# Altium PCB doan2.PcbDoc
Units mil, origin at the board's own origin, x right, y up, seen from the top; angles counter-clockwise.
Board outline 2190 x 3135 mil, 2 copper layers (Top Layer, Bottom Layer); 62 components, 43 nets, 240 pads, 31 vias.
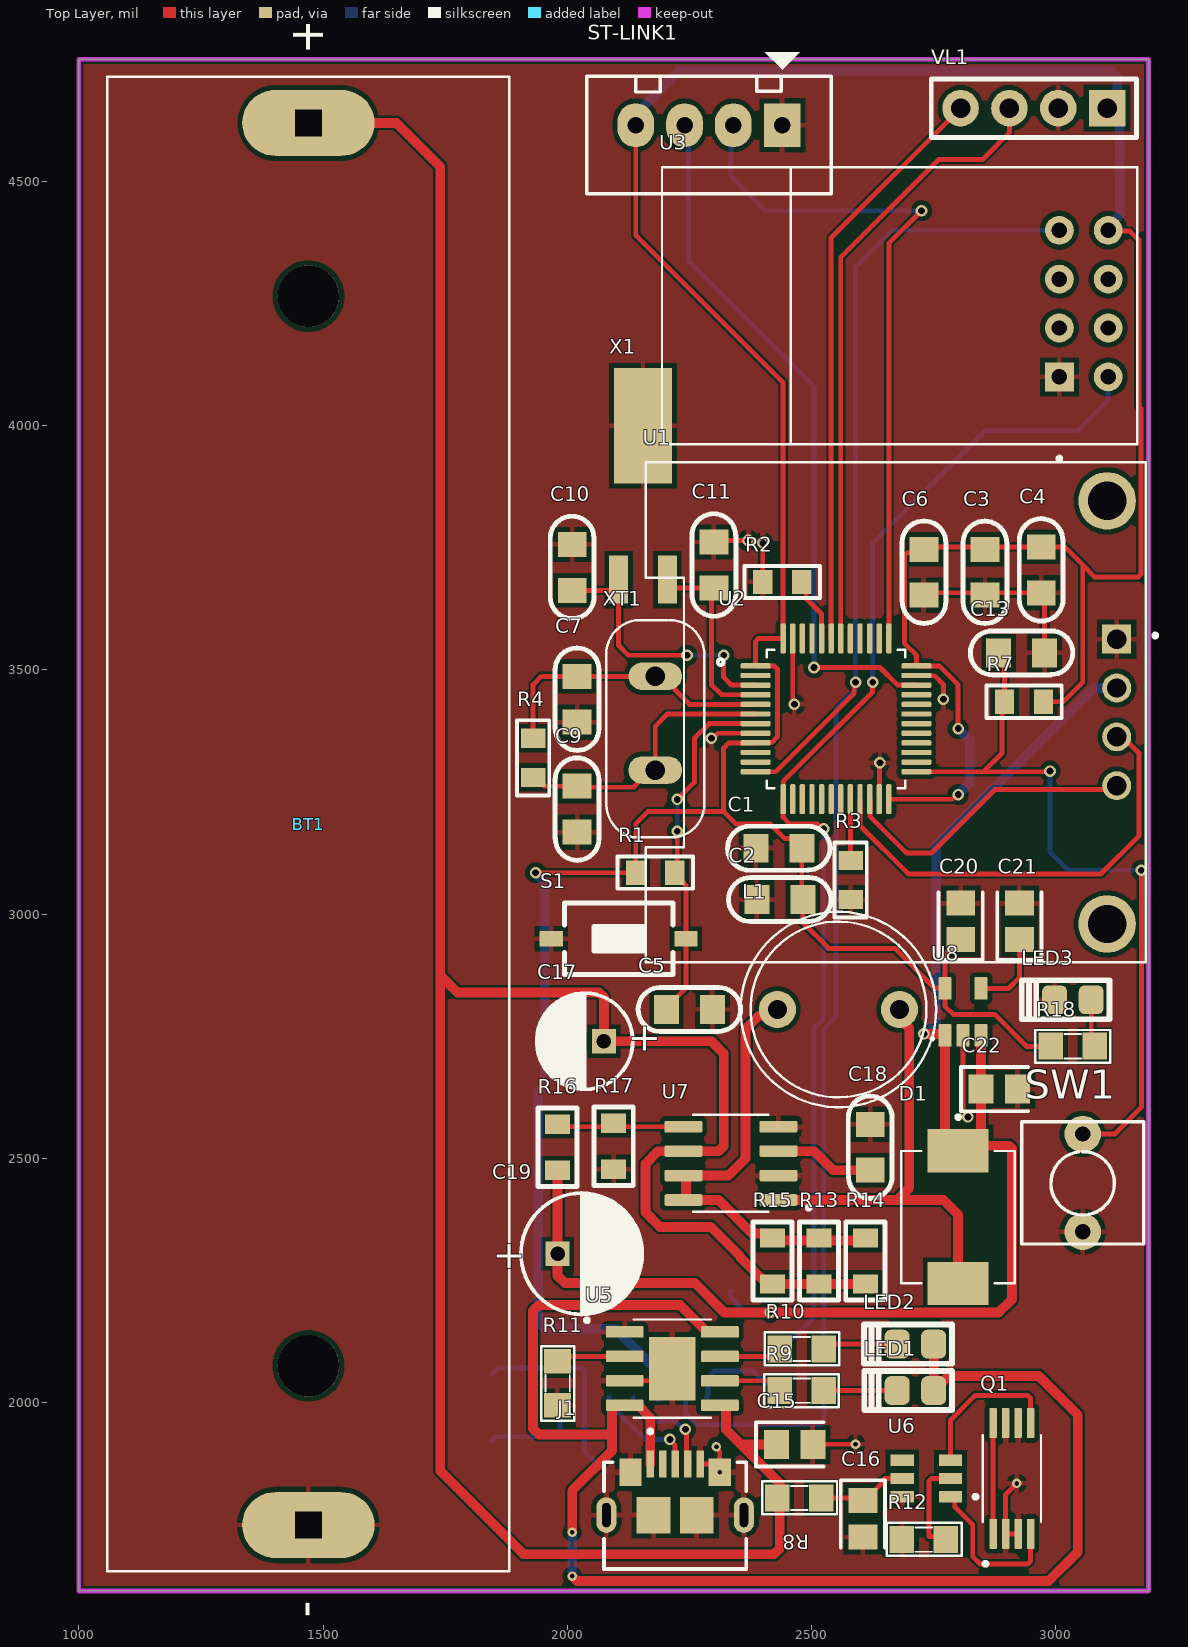
[diagram p0: Top Layer view]
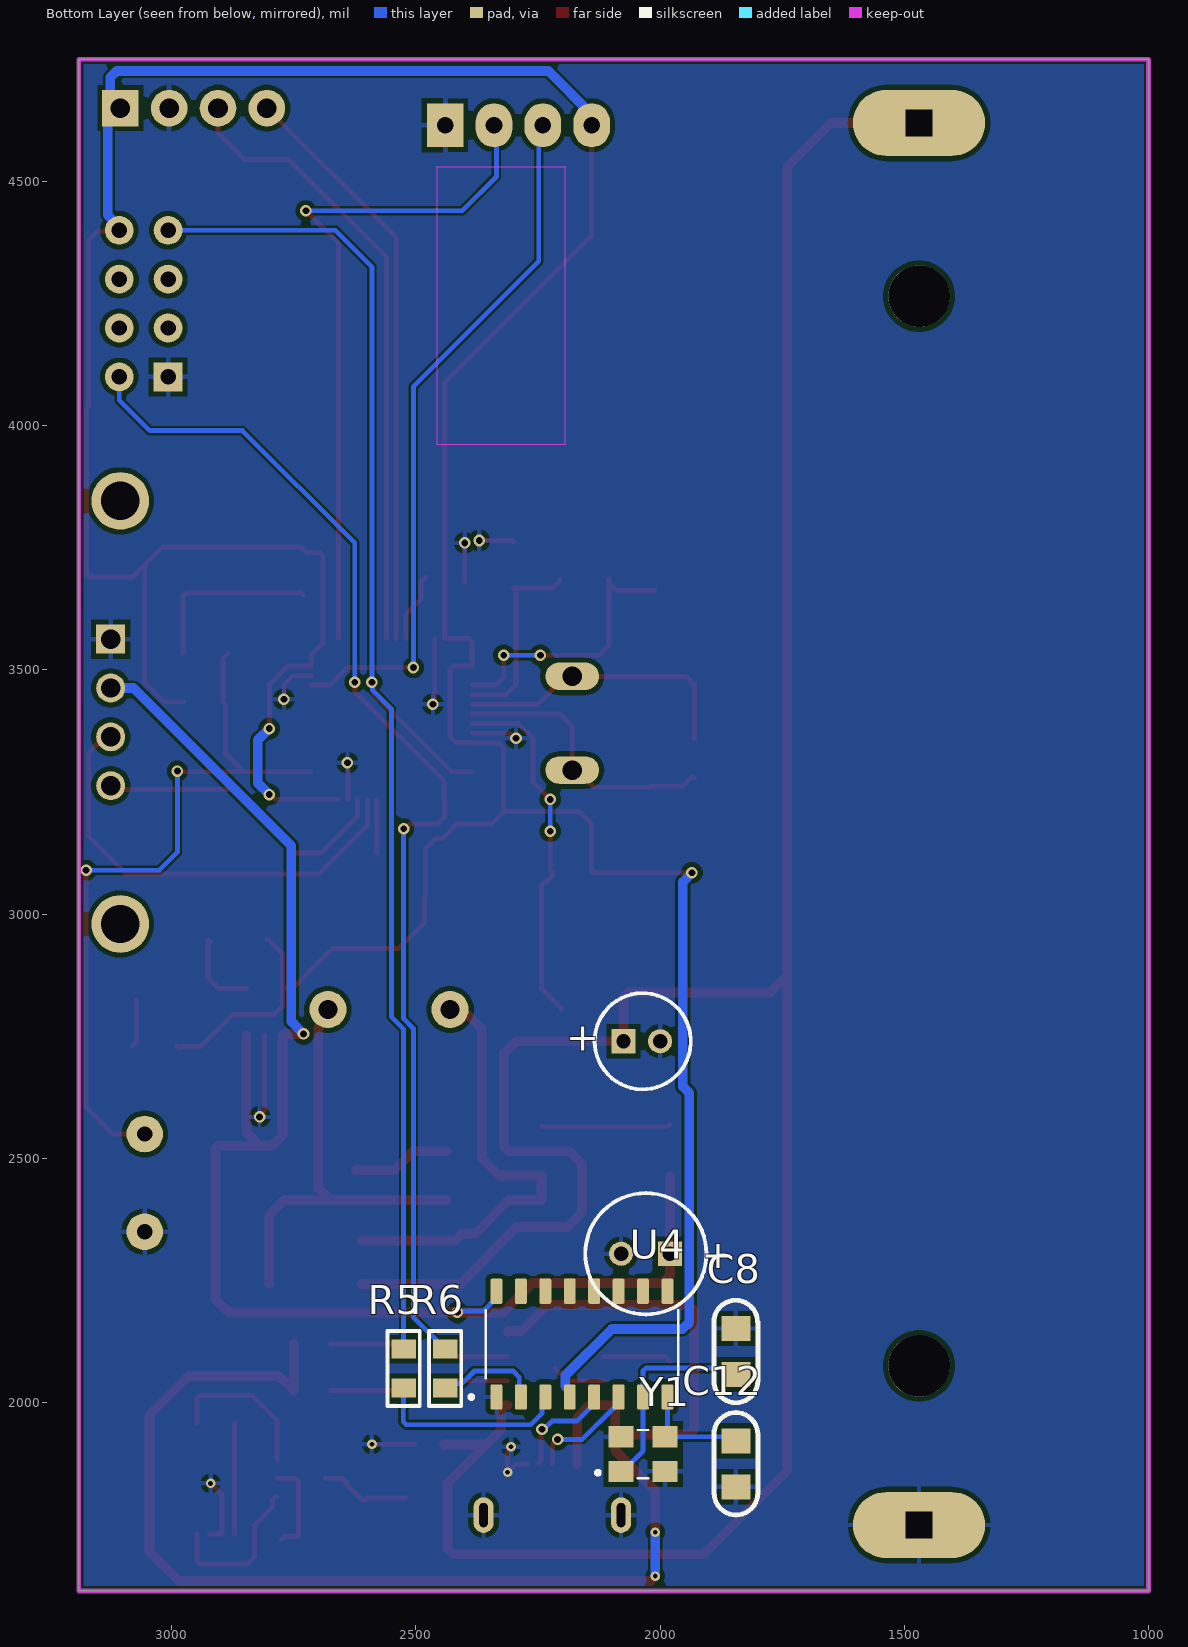
[diagram p1: Bottom Layer view, seen from below]
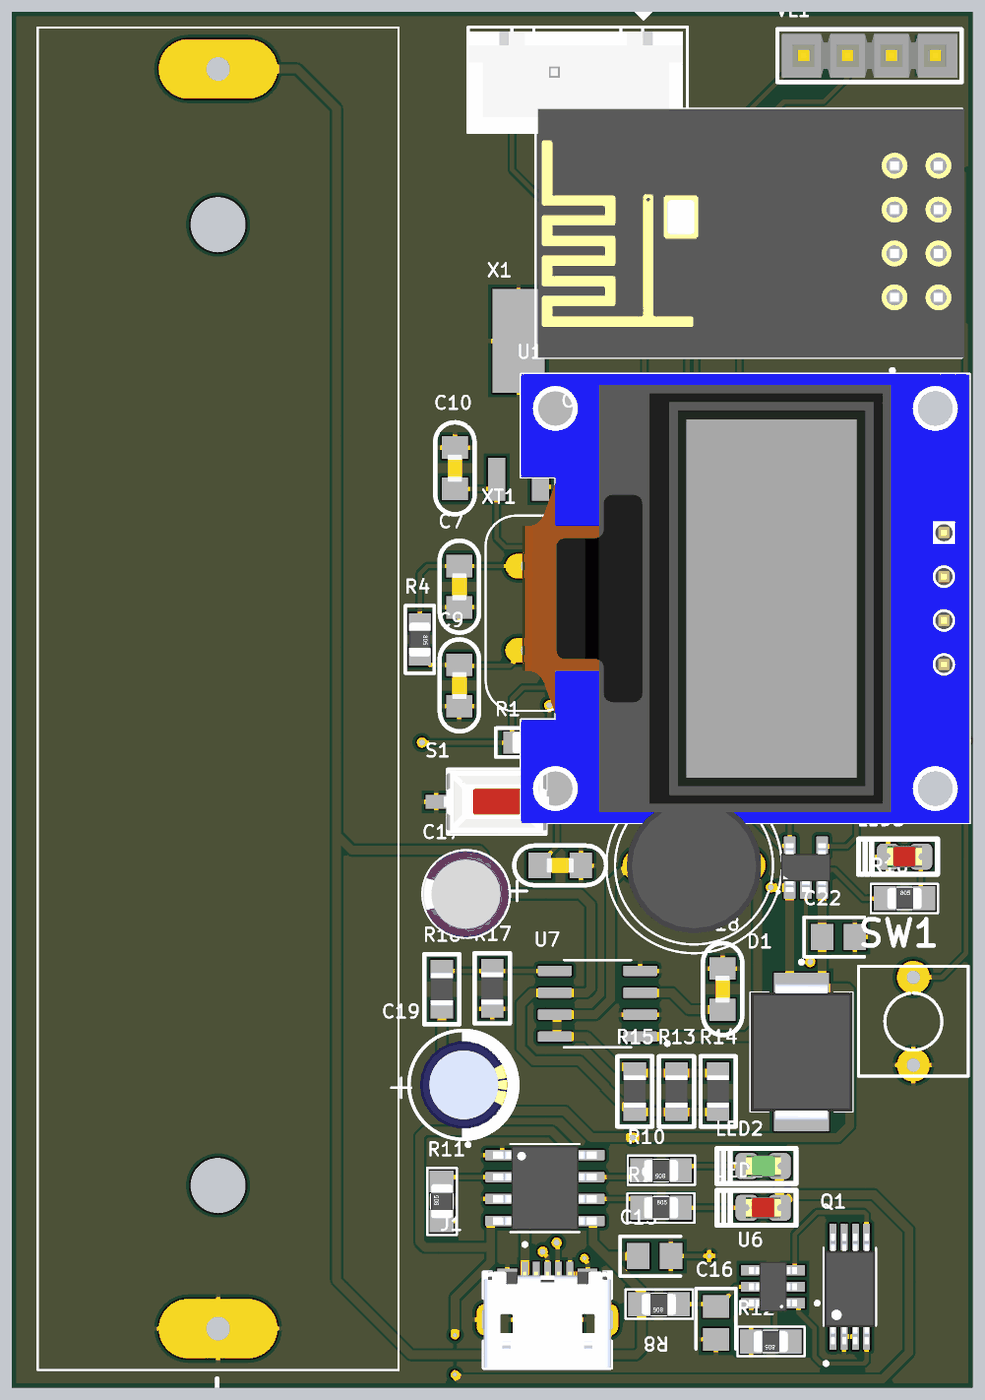
[diagram p2: 3D render of the assembled board from above, using the file's embedded part models]
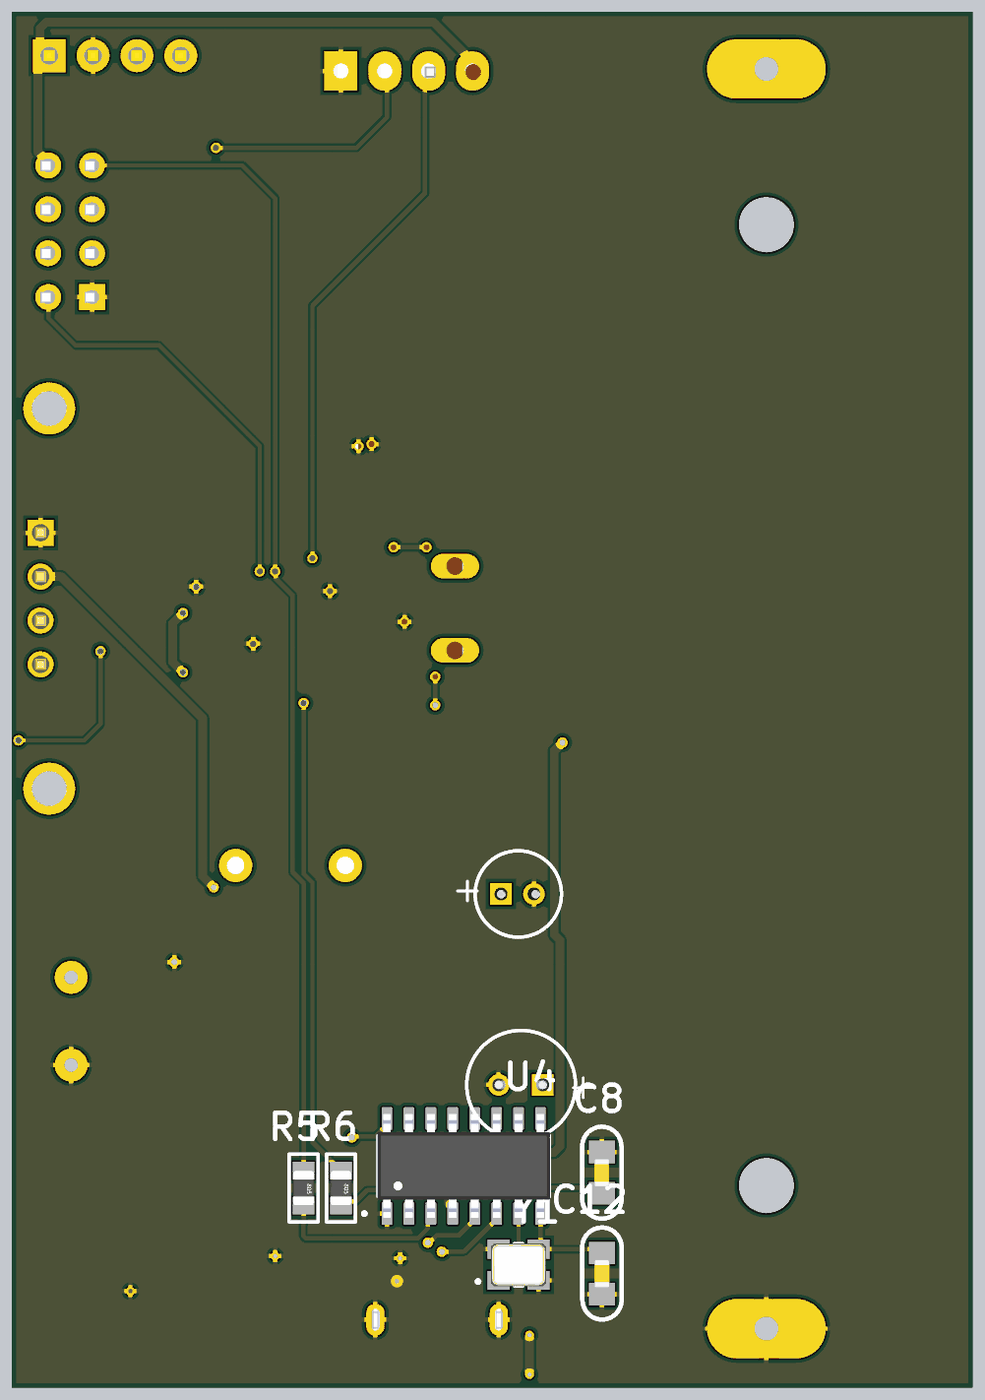
[diagram p3: 3D render of the assembled board from below, using the file's embedded part models]

## Layer stack, top to bottom
Top Solder: solder mask 0.4, Solder Resist, Dk 3.5
Top Layer: signal copper 1.4
Dielectric 1: dielectric 12.6, FR-4, Dk 4.8
Bottom Layer: signal copper 1.4
Bottom Solder: solder mask 0.4, Solder Resist, Dk 3.5

## Board outline
1000,1615 1000,4750 3190,4750 3190,1615

## Design rules (kind name [scope] priority, off if disabled: settings)
Clearance [All] p1: gap=10 ignorepadtopadclearanceinfootprint=TRUE except(5: Arc-Arc Arc-Track Arc-SMDPad Arc-THPad Arc-Via Arc-Fill Arc-Poly Arc-Region Arc-Text Arc-Hole Track-Track Track-SMDPad Track-THPad Track-Via Track-Fill Track-Poly Track-Region Track-Text Track-Hole)
HoleSize [All] p1: absolutevalues=TRUE maxlimit=200 minlimit=1 maxpercent=80.000 minpercent=20.000
PolygonConnect [All] p1: connectstyle=Relief reliefconductorwidth=10 reliefentries=4 polygonreliefangle="90 Angle" airgapwidth=10
RoutingVias [All] p1: holewidth=10 width=20 viastyle="Through Hole" minholewidth=10 minwidth=20 maxholewidth=10 maxwidth=20
SolderMaskExpansion [All] p1: expansion=4 istentingtop=FALSE
Width [All] p1: maxlimit=20 minlimit=10 preferedwidth=10 minimp=50.000000 maximp=50.000000 favimp=50.000000
29 further rules are at their usual default settings.

## Classes and differential pairs
component class Power_supply: BT1 C15 C16 C17 C18 C19 C20 C21 C22 D1 J1 L1 LED1 LED2 LED3 Q1 R8 R9 R10 R11 R12 R13 R14 R15 R16 R17 R18 U5 U6 U7 U8
component class doan2: C1 C2 C3 C4 C5 C6 C7 C8 C9 C10 C11 C12 C13 R1 R2 R3 R4 R5 R6 R7 S1 ST-LINK1 SW1 U1 U2 U3 U4 VL1 X1 XT1 Y1

## Components (designator, comment, footprint, x,y, rotation, side; value= is the part's Value field where it differs from the comment)
BT1 "BH-18650-PC" BAT_BH-18650-PC 1470,3184.68 r90 top
C1 "Cap Non-pol" C-NP-0805 2433,3135 r0 top value=104
C2 "Cap Non-pol" C-NP-0805 2435,3030 r0 top value=104
C3 "Cap Non-pol" C-NP-0805 2855,3700 r90 top value=104
C4 "Cap Non-pol" C-NP-0805 2970,3705 r90 top value=104
C5 "Cap Non-pol" C-NP-0805 2250,2805 r0 top value=104
C6 "Cap Non-pol" C-NP-0805 2730,3700 r270 top value=104
C7 "Cap Non-pol" C-NP-0805 2020,3440 r270 top value=30pF
C8 "Cap Non-pol" C-NP-0805 1845,2105 r90 bottom value=22pF
C9 "Cap Non-pol" C-NP-0805 2020,3215 r270 top value=30pF
C10 "Cap Non-pol" C-NP-0805 2010,3710 r90 top value=10pF
C11 "Cap Non-pol" C-NP-0805 2300,3715 r90 top value=10pF
C12 "Cap Non-pol" C-NP-0805 1845,1875 r270 bottom value=22pF
C13 "Cap Non-pol" C-NP-0805 2930,3535 r0 top value=104
C15 "10uF" C2012-0805 2465,1915 r0 top
C16 "10uF" C2012-0805 2605.28,1762.81 r270 top
C17 "Cap Pol" "RADIAL B" 2075,2740 r180 top value=220uF
C18 "Cap Non-pol" C-NP-0805 2620,2523 r270 top value=0.1uF
C19 "Cap Pol" "RADIAL C" 1980,2305 r0 top value=470uF
C20 "1uF" C2012-0805 2805,2985 r90 top
C21 "22nF" C2012-0805 2925,2985 r90 top
C22 "1uF" C2012-0805 2884.2,2642.24 r0 top
D1 "SS34" DIOM7959X265N 2800,2380 r270 top
J1 "USB3076-XX-X_REVC5" GCT_USB3076-XX-X_REVC5 2220.75,1770 r0 top
L1 "100uH" IMPE8-RS2 2680,2805 r180 top
LED1 "LED-0805RVC" "Led 0805R" 2712.6,2025 r180 top value=Red
LED2 "LED-0805GVC" "Led 0805G" 2712.4,2120 r180 top value=Green
LED3 "LED-0805RVC" "Led 0805R" 3035,2825 r180 top value=Red
Q1 "FS8205A" SOP65P640X120-8N 2910,1845 r90 top
R1 "RES_SMD_0805" "DIEN TRO 0805" 2180,3085 r180 top value=100R
R2 "RES_SMD_0805" "DIEN TRO 0805" 2440,3680 r180 top value=100R
R3 "RES_SMD_0805" "DIEN TRO 0805" 2580,3070 r90 top value=100R
R4 "RES_SMD_0805" "DIEN TRO 0805" 1930,3320 r90 top value=1k
R5 "RES_SMD_0805" "DIEN TRO 0805" 2525,2070 r90 bottom value=100R
R6 "RES_SMD_0805" "DIEN TRO 0805" 2440,2070 r90 bottom value=100R
R7 "RES_SMD_0805" "DIEN TRO 0805" 2935,3435 r0 top value=1k
R8 "RESISTOR SMD" RES-SM-0805 2520,1805 r180 top value=1K
R9 "RESISTOR SMD" RES-SM-0805 2435,2025 r0 top value=1K
R10 "RESISTOR SMD" RES-SM-0805 2525,2110 r180 top value=1K
R11 "RESISTOR SMD" RES-SM-0805 1980,1995 r90 top value=1K
R12 "RESISTOR SMD" RES-SM-0805 2775,1720 r180 top value=1K
R13 "RESISTOR" R-0805 2515,2290 r90 top value=1K
R14 "RESISTOR" R-0805 2610,2290 r90 top value=1K
R15 "RESISTOR" R-0805 2420,2290 r90 top value=1K
R16 "RESISTOR" R-0805 1980,2523 r270 top value=1.2k
R17 "RESISTOR" R-0805 2095,2525 r90 top value=390R
R18 "RESISTOR SMD" RES-SM-0805 2990,2730 r0 top value=220R
S1 "SW-SMD" SW-SMD 2105,2950 r0 top
ST-LINK1 "JP4" CON4 2440,4615 r180 top value="Connector 4"
SW1 "SW" SW2 3055,2350 r90 top value="SW chip 2 pin"
U1 "DM-OLED096-636" MODULE_DM-OLED096-636 2671.93,3413.07 r270 top
U2 "STM32F103C8T6" QFP50P900X900X160-48N 2550,3400 r0 top
U3 "ESP8266-01/ESP-01" XCVR_ESP8266-01/ESP-01 2680,4250 r90 top
U4 "CH340G" SOIC127P600X180-16N 2160,2120 r90 bottom
U5 "TP4056" SOP127P600X175-9N 2215,2070 r0 top
U6 "DW01A" SOT95P280X145-6N 2735,1845 r180 top
U7 "MC34063ADG4" SOIC127P599X175-8N 2335,2490 r180 top
U8 "RT9193-33GB" SOT94P279X129-5N 2810,2800 r90 top
VL1 "Header 4" "Header 4" 3105,4650 r180 top
X1 "Crystal1" "Crystal cylinder" 2205,3685 r270 top value=32.768Khz
XT1 "Crystal2" Crystal.HC49/USxx 2180,3295 r180 top value=4MHz
Y1 "8Mhz" XTAL_ECS-250-6-33B2-CTN-TR3 2035,1895 r180 bottom

## Footprints (in the part's own frame and the unit in brackets; to place one, negate y for a bottom-side part, rotate by r counter-clockwise, add the part's x,y. Pads: shape width x height; smd on the part's side, far side on the other; paste and mask are expansions set on the pad)
BAT_BH-18650-PC [mm]
  oval 3.44x6.88 hole 1.38 square: N(-36.45,0) P(36.45,0)
  round 3.2 hole 3.2 unplated: ""(-28.17,0) ""(27.44,0)
  silkscreen extent -38.85,-10.45 38.85,10.45
C2012-0805 [mm] "Capacitor Chip 0805 package"
  rect 1.3x1.5 smd: 1(-0.945,-0.007) 2(0.955,-0.007)
  silkscreen extent -1.99,-1.16 1.51,1.14, body extent -0.89,-0.58 0.89,0.58, height 0.79
C-NP-0805 [mm] "Chip Capacitor; Non-polarized; Body 2.0 x 1.3 mm (LxW typ) [2012]"
  rect 1.3x1.5 smd: 1(-1.194,0) 2(1.194,0)
  silkscreen extent -2.67,-1.14 2.66,1.14, body extent -0.8,-0.43 0.8,0.43, height 0.79
CON4 [mil] "CON4"
  rect 75x90 hole 34: 1(0,0)
  oval 75x90 hole 34: 2(100,0) 3(200,0) 4(300,0)
  silkscreen extent -100,-150 400,140, body extent -90,-90 398,136, height 276
"Crystal cylinder" [mm] "Crystal footsprint type 1"
  rect 2.5x1 smd: 1(0,0) 2(0,-2.54)
  rect 6x3 smd: 3(-8,-1.27)
  body extent -10.02,-2.6 0.53,0.07, height 2.29
Crystal.HC49/USxx [mil] "HC49USxx package"
  rrect100% 110x56 hole 40: 1(0,0) 2(0,-192)
  silkscreen extent -100,-307 100,138, body extent -90,-298 90,128, height 200
"DIEN TRO 0805" [mil] "Chip Resistor; Body 2.0 x 1.3 mm (LxW typ)"
  rect 39.37x50 smd: 1(-40,0) 2(40,0)
  silkscreen extent -77,-33 77,33, body extent -39,-25 39,25, height 31
DIOM7959X265N [mm]
  rect 2.25x3.18 smd: A(3.455,0) C(-3.455,0)
  silkscreen extent -5.3,-2.95 3.44,2.95, body extent -3.98,-2.95 3.98,2.95, height 2.65
GCT_USB3076-XX-X_REVC5 [mm]
  rect 0.4x1.4 smd: 1(-1.3,2.65) 2(-0.65,2.65) 3(0,2.65) 4(0.65,2.65) 5(1.3,2.65)
  oval 1.05x1.85 hole 0.45 slot 1.252 at 90 deg: 6(-3.575,0) 7(3.575,0)
  rect 1.15x1.45 smd: 8(-2.32,2.23) 9(2.32,2.23)
  rect 1.75x1.9 smd: 10(-1.125,0) 11(1.125,0)
  silkscreen extent -3.7,-2.8 3.7,4.45, body extent -3.7,-2.78 3.7,2.78, height 2.66
"Header 4" [mil] "Connector; Header; 4 Position; Solder Pad 35mil"
  rect 75x75 hole 40: 1(0,0)
  round 75 hole 40: 2(100,0) 3(200,0) 4(300,0)
  silkscreen extent -60,-60 360,60, body extent -50,-50 350,50, height 330
IMPE8-RS2 [mil] "Body round radial diam 10mm - hight 18mm"
  round 76 hole 39.37: 1(0,0) 2(250,0)
  silkscreen extent -75,-200 325,200, body extent -29,-152 279,155, height 209
"Led 0805G" [mm]
  rrect50% 1.3x1.5 smd: 1(-0.95,0) 2(0.95,0)
  silkscreen extent -1.91,-1.02 2.67,1.02, body extent -1.04,-0.62 0.98,0.62, height 1.1
"Led 0805R" [mm]
  rrect50% 1.3x1.5 smd: 1(-0.95,0) 2(0.95,0)
  silkscreen extent -1.91,-1.02 2.67,1.02, body extent -1.01,-0.63 1.01,0.62, height 1.1
MODULE_DM-OLED096-636 [mm]
  rect 1.508x1.508 / inner round 1.508 / far side rect 1.508x1.508 hole 1: 1(-3.81,11.5)
  round 1.508 hole 1: 2(-1.27,11.5) 3(1.27,11.5) 4(3.81,11.5)
  round 3 hole 2: S1(-11,11) S2(11,11)
  round 3 on Top Paste: S3(11,-11) S4(-11,-11)
  silkscreen extent -13,-13 13,13.6, body extent -13,-13 13,13, height 5.66
QFP50P900X900X160-48N [mm]
  rrect50% 1.56x0.28 smd: 1(-4.18,2.75) 2(-4.18,2.25) 3(-4.18,1.75) 4(-4.18,1.25) 5(-4.18,0.75) 6(-4.18,0.25) 7(-4.18,-0.25) 8(-4.18,-0.75) 9(-4.18,-1.25) 10(-4.18,-1.75) 11(-4.18,-2.25) 12(-4.18,-2.75) 25(4.18,-2.75) 26(4.18,-2.25) 27(4.18,-1.75) 28(4.18,-1.25) 29(4.18,-0.75) 30(4.18,-0.25) 31(4.18,0.25) 32(4.18,0.75) 33(4.18,1.25) 34(4.18,1.75) 35(4.18,2.25) 36(4.18,2.75)
  rrect50% 0.28x1.56 smd: 13(-2.75,-4.18) 14(-2.25,-4.18) 15(-1.75,-4.18) 16(-1.25,-4.18) 17(-0.75,-4.18) 18(-0.25,-4.18) 19(0.25,-4.18) 20(0.75,-4.18) 21(1.25,-4.18) 22(1.75,-4.18) 23(2.25,-4.18) 24(2.75,-4.18) 37(2.75,4.18) 38(2.25,4.18) 39(1.75,4.18) 40(1.25,4.18) 41(0.75,4.18) 42(0.25,4.18) 43(-0.25,4.18) 44(-0.75,4.18) 45(-1.25,4.18) 46(-1.75,4.18) 47(-2.25,4.18) 48(-2.75,4.18)
  silkscreen extent -6.15,-3.6 3.6,3.6, body extent -4.5,-4.5 4.5,4.5, height 1.6
R-0805 [mm] "Chip Resistor; Body 2.0 x 1.3 mm (LxW typ) [2012]"
  rect 1x1.3 smd: 1(-1.194,0) 2(1.194,0)
  silkscreen extent -2.03,-1.02 2.03,1.02, body extent -0.95,-0.65 0.95,0.65, height 0.63
"RADIAL B" [mm] "Capacitor, Electrolytic, Radial; Body 5 x 6.8 mm (Dia.xH typ); Pin Spacing 2 mm (typ)"
  rect 1.25x1.25 hole 0.75: 1(0,0)
  round 1.25 hole 0.75: 2(1.905,0)
  silkscreen extent -1.5,-2.5 3.5,2.51, body extent -1.48,-2.49 3.52,2.51, height 11
"RADIAL C" [mm] "Capacitor, Electrolytic, Radial; Body 6.3 x 6.8 mm (Dia.xH typ); Pin Spacing 2.5 mm (typ)"
  rect 1.25x1.25 hole 0.75: 1(0,0)
  round 1.25 hole 0.75: 2(2.54,0)
  silkscreen extent -1.9,-3.15 4.4,3.15, body extent -1.27,-2.54 3.81,2.54, height 13.7
RES-SM-0805 [mil]
  rect 50x55 smd: 1(0,0) 2(90,0)
  silkscreen extent -32,-34 121,33, body extent 6,-25 84,25, height 31
SOIC127P599X175-8N [mm]
  rrect25% 1.97x0.6 smd: 1(-2.47,1.905) 2(-2.47,0.635) 3(-2.47,-0.635) 4(-2.47,-1.905) 5(2.47,-1.905) 6(2.47,-0.635) 7(2.47,0.635) 8(2.47,1.905)
  silkscreen extent -4.14,-2.52 1.95,2.52
SOIC127P600X180-16N [mm]
  rrect25% 1.31x0.62 smd: 1(-2.75,4.445) 2(-2.75,3.175) 3(-2.75,1.905) 4(-2.75,0.635) 5(-2.75,-0.635) 6(-2.75,-1.905) 7(-2.75,-3.175) 8(-2.75,-4.445) 9(2.75,-4.445) 10(2.75,-3.175) 11(2.75,-1.905) 12(2.75,-0.635) 13(2.75,0.635) 14(2.75,1.905) 15(2.75,3.175) 16(2.75,4.445)
  silkscreen extent -2.85,-5 1.78,5.85, body extent -3,-5 3,5, height 1.8
SOP65P640X120-8N [mm]
  rrect25% 1.56x0.4 smd: 1(-2.88,0.975) 2(-2.88,0.325) 3(-2.88,-0.325) 4(-2.88,-0.975) 5(2.88,-0.975) 6(2.88,-0.325) 7(2.88,0.325) 8(2.88,0.975)
  silkscreen extent -4.54,-1.52 2.25,1.52, body extent -3.33,-1.47 3.07,1.47, height 1.2
SOP127P600X175-9N [mm]
  rrect25% 1.97x0.6 smd: 1(-2.475,1.905) 2(-2.475,0.635) 3(-2.475,-0.635) 4(-2.475,-1.905) 5(2.475,-1.905) 6(2.475,-0.635) 7(2.475,0.635) 8(2.475,1.905)
  rect 2.413x3.302 smd paste-3: 9(0,0)
  silkscreen extent -4.54,-2.55 2,2.6, body extent -3,-2.45 3,2.45, height 1.75
SOT94P279X129-5N [mm]
  rrect12% 1.17x0.67 smd: 1(-1.22,0.94) 2(-1.22,0) 3(-1.22,-0.94) 4(1.22,-0.94) 5(1.22,0.94)
  silkscreen extent -1.47,1.53 -1.33,1.67, body extent -1.4,-1.45 1.4,1.45, height 1.3
SOT95P280X145-6N [mm]
  rect 1.21x0.59 smd: 1(-1.255,0.95) 2(-1.255,0) 3(-1.255,-0.95) 4(1.255,-0.95) 5(1.255,0) 6(1.255,0.95)
  silkscreen extent -2.66,0.85 -2.46,1.05, body extent -1.4,-1.45 1.4,1.45, height 1.45
SW2 [mil] "SW button 2pin, 250x 250 mil"
  round 75 hole 31: 1(0,0) 2(200,0)
  silkscreen extent -25,-125 225,125
SW-SMD [mm] "Switch SMD type"
  rect 1.2x0.8 smd: 1(-3.5,0) 2(3.5,0)
  silkscreen extent -2.82,-1.85 2.82,1.85, body extent -3.05,-1.85 3.05,1.85, height 2.5
XCVR_ESP8266-01/ESP-01 [mm]
  rect 1.5x1.5 hole 0.8: 1(-3.81,-8.31)
  round 1.5 hole 0.8: 2(-1.27,-8.31) 3(1.27,-8.31) 4(3.81,-8.31) 5(-3.81,-10.85) 6(-1.27,-10.85) 7(1.27,-10.85) 8(3.81,-10.85)
  Keep-Out Layer region: 7.09,5.65 -7.31,5.65 -7.31,12.35 7.09,12.35
  silkscreen extent -8.16,-12.35 7.09,12.35, body extent -7.33,-12.48 7.07,12.22, height 11.58
XTAL_ECS-250-6-33B2-CTN-TR3 [mm]
  rect 1.3x1.1 smd: 1(-1.15,-0.9) 2(1.15,-0.9) 3(1.15,0.9) 4(-1.15,0.9)
  silkscreen extent -2.45,-1.25 0.27,1.25, body extent -1.6,-1.25 1.6,1.25, height 0.8

## Part data
BT1: "Battery Holder _Open_ 18650 1 Cell PC Pin", Package="DFN-8 Memory Protection Devices", Availability=Unavailable, MF="MPD _Memory", MP=BH-18650-PC, Price=None, SnapEDA_Link=https://www.snapeda.com/parts/BH-18650-PC/MPD%20%28Memory%20Protection%20Devices%29/view-part/779074/?ref=snap
C1 C2 C3 C4 C5 C6 C7 C8 C9 C10 C11 C12 C13 C18: "Non-polarized Capacitor", LatestRevisionDate=17-Jul-2002, LatestRevisionNote="Re-released for DXP Platform.", PackageReference=RAD-0.3, Published=8-Jun-2000, Publisher="Altium Limited"
C15 C16: library part Cap_Pol, "Polarized Capacitor", Capacitor Type=Tant, Manufacturer=FARNELL, Volt=25V, AEMS Code=2100110, ComponentLink1Description="Digikey Part Link", ComponentLink2Description="Open Datasheet", ComponentLink2URL=H:\LIBRARY\LIBRARY.Datasheet\, Published=13-April-2009, Publisher="Hoang Nguyen", Vendor=Digikey
C17 C19: "Polarized Capacitor", LatestRevisionDate=17-Jul-2002, LatestRevisionNote="Re-released for DXP Platform.", PackageReference=POLAR0.8, Published=8-Jun-2000, Publisher="Altium Limited"
C20 C21 C22: library part Cap_Pol, "Polarized Capacitor", Manufacturer=FARNELL, AEMS Code=2100110, ComponentLink1Description="Digikey Part Link", ComponentLink2Description="Open Datasheet", ComponentLink2URL=H:\LIBRARY\LIBRARY.Datasheet\, Published=13-April-2009, Publisher="Hoang Nguyen", Vendor=Digikey
D1: "Diode Schottky 40 V 3A Surface Mount SMC (DO-214AB)", Package="SMC-2 ON Semiconductor", Check_prices=https://www.snapeda.com/parts/SS34/Onsemi/view-part/?ref=eda, MF=onsemi, MP=SS34, SnapEDA_Link=https://www.snapeda.com/parts/SS34/Onsemi/view-part/?ref=snap
J1: "USB - micro B USB 2.0 Receptacle Connector 5 Position Surface Mount, Right Angle; Through Hole, 2.35mm profile, 5 Pins, Horizontal, Bottom mount", Package=None, Availability="In Stock", Check_prices=https://www.snapeda.com/parts/USB3076-30-A/Global+Connector+Technology/view-part/?ref=eda, MF="Global Connector Technology", MP=USB3076-30-A, Price=None, Purchase-URL=https://pricing.snapeda.com/search/part/USB3076-30-A/?ref=eda, SnapEDA_Link=https://www.snapeda.com/parts/USB3076-30-A/Global+Connector+Technology/view-part/?ref=snap
L1: library part Inductor_1, "Cuon Cam L", Code_IEC=1005, Code_JEITA=0402, ComponentLink1Description="Digikey Part Link", ComponentLink2Description="Open Datasheet", ComponentLink2URL=H:\LIBRARY\LIBRARY.Datasheet\, LatestRevisionDate=17-Jul-2002, LatestRevisionNote="Re-released for DXP Platform.", PackageReference=0402-A, Published=8-Jun-2000, Publisher="Altium Limited", Vendor=Digikey
LED1 LED3: "LED Red 2mA 1.8V 0805", ComponentLink1Description=Datasheet, ComponentLink1URL="D:\Dropbox\Datasheets\Opto and Illumination\LEDs\SMD LED.pdf", Unit Price=0.0476
LED2: "LED Green 2mA 3V 0805", ComponentLink1Description=Datasheet, ComponentLink1URL="D:\Dropbox\Datasheets\Opto and Illumination\LEDs\SMD LED.pdf", Unit Price=0.0476
Q1: "N/A", Package=Package, Availability="Not in stock", Check_prices=https://www.snapeda.com/parts/FS8205A/Fortune+Semiconductor/view-part/?ref=eda, MF="Fortune Semiconductor", MP=FS8205A, Price=None, SnapEDA_Link=https://www.snapeda.com/parts/FS8205A/Fortune+Semiconductor/view-part/?ref=snap
R1 R2 R3 R4 R5 R6 R7: "RES_0805", LatestRevisionDate=17-Jul-2002, LatestRevisionNote="Re-released for DXP Platform.", PackageReference=AXIAL-0.4, Published=8-Jun-2000, Publisher="Altium Limited"
R8 R9 R10 R11 R12 R13 R14 R15 R16 R17 R18: "Resistor"
  R13 R14 R15 R16 R17: LatestRevisionDate=17-Jul-2002, LatestRevisionNote="Re-released for DXP Platform.", PackageReference=AXIAL-0.3, Published=8-Jun-2000, Publisher="Altium Limited"
S1: "Switch", LatestRevisionDate=17-Jul-2002, LatestRevisionNote="Re-released for DXP Platform.", PackageReference=SPST-2, Published=24-Mar-1999, Publisher="Altium Limited"
ST-LINK1: library part Con4, "Connector 4"
SW1: library part SW2, "Switch button 2 pin"
U1: "0.96â€ 128 X 64 MONOCHROME GRAPHIC OLED DISPLAY MODULE - I2C", Package=Package, Check_prices=https://www.snapeda.com/parts/DM-OLED096-636/Display+Module/view-part/?ref=eda, MF="Display Module", MP=DM-OLED096-636, SnapEDA_Link=https://www.snapeda.com/parts/DM-OLED096-636/Display+Module/view-part/?ref=snap
U2: "ARM® Cortex®-M3 STM32F1 Microcontroller IC 32-Bit 72MHz 64KB (64K x 8) FLASH 48-LQFP (7x7)", Package="LQFP-48 STMicroelectronics", Check_prices=https://www.snapeda.com/parts/STM32F103C8T6/STMicroelectronics/view-part/?ref=eda, MF=STMicroelectronics, MP=STM32F103C8T6, SnapEDA_Link=https://www.snapeda.com/parts/STM32F103C8T6/STMicroelectronics/view-part/?ref=snap
U3: "MakerFocus 4pcs ESP8266 ESP-01 Serial Wireless WiFi Transceiver Receiver Module 1MB SPI Flash DC3.0-3.6V Internet of Things WiFi Module Board Compatible with Ar duino", Package=None, Availability=Unavailable, MP=ESP8266-01/ESP-01, Price=None
U4: "USB Interface Integrated Circuit", Package=None, Availability="Not in stock", Check_prices=https://www.snapeda.com/parts/Ch340G/WCH/view-part/?ref=eda, MF=WCH, MP=Ch340G, Price=None, SnapEDA_Link=https://www.snapeda.com/parts/Ch340G/WCH/view-part/?ref=snap
U5: "Complete single cell Li-Ion battery with a constant current / constant voltage linear charger", Package=Package, Availability="Not in stock", Check_prices=https://www.snapeda.com/parts/TP4056/NanJing+Top+Power+ASIC+Corp./view-part/?ref=eda, MF="NanJing Top Power ASIC Corp.", MP=TP4056, Price=None, SnapEDA_Link=https://www.snapeda.com/parts/TP4056/NanJing+Top+Power+ASIC+Corp./view-part/?ref=snap
U6: "One Cell Lithium-ion/Polymer Battery Protection IC", Package="SOT-23-6 Fortune Semiconductor", Check_prices=https://www.snapeda.com/parts/DW01A/Fortune+Semiconductor/view-part/?ref=eda, MF="Fortune Semiconductor", MP=DW01A, SnapEDA_Link=https://www.snapeda.com/parts/DW01A/Fortune+Semiconductor/view-part/?ref=snap
U7: Package=None, Availability=Unavailable, MP=MC34063ADG4, Price=None
U8: "Linear Voltage Regulator IC Positive Fixed 1 Output 300mA TSOT-23-5", Package="SOT-23-5 Richtek", Check_prices=https://www.snapeda.com/parts/RT9193-33GB/Richtek+USA+Inc./view-part/?ref=eda, Digi-Key_Part_Number=1028-1014-2-ND, MF="Richtek USA", MP=RT9193-33GB, Purchase-URL=https://pricing.snapeda.com/search/part/RT9193-33GB/?ref=eda, SnapEDA_Link=https://www.snapeda.com/parts/RT9193-33GB/Richtek+USA+Inc./view-part/?ref=snap
VL1: "Header, 4-Pin", LatestRevisionDate=17-Jul-2002, LatestRevisionNote="Re-released for DXP Platform.", Publisher="Altium Limited"
X1: "Tuning Forl Crystal Units (SMD-Cylinder Type)", ComponentLink1Description="Digikey Part Link", ComponentLink1URL=http://search.digikey.com/scripts/DkSearch/dksus.dll?Detail&name=300-2066-1-ND, ComponentLink2Description="Open Datasheet", ComponentLink2URL=H:\LIBRARY\LIBRARY.Datasheet\k-cmr.pdf, Published=13-April-2009, Publisher="Hoang Nguyen", Vendor=Digikey
XT1: "Quarz Crystal", ComponentLink1Description="Digikey Part Link", ComponentLink2Description="Open Datasheet", ComponentLink2URL=H:\LIBRARY\LIBRARY.Datasheet\, Price="2000 VND", Published=13-April-2009, Publisher="Hoang Nguyen", Vendor=Digikey
Y1: library part ECS-250-6-33B2-CTN-TR3, Package=None, Availability=Unavailable, MP=ECS-250-6-33B2-CTN-TR3, Price=None

## Via types
v1: diameter 23.62, hole 13.78, Top Layer to Bottom Layer, 25 vias
v2: diameter 20, hole 10, Top Layer to Bottom Layer, 6 vias

## Nets (pads, with @x,y where several pads share a name; then routed paths per layer and width w, separated by ;. In a path a pad name is that pad's centre, name@x,y a point inside that pad or via, vN(x,y) a via of type N, cw(c..) or ccw(c..) an arc to the next point about the centre after c; other vN are vias at no path point)
3v3: C1.2 C2.2 C3.2 C4.2 C6.1 C20.1 R1.2 R7.2 R18.1 ST-LINK1.4 U2.1 U2.9 U2.24 U2.36 U2.48 U3.8 U4.4 U8.5 VL1.1 | length 8326.4
  Top Layer w10: v1(1935,3085) R1.2 2140,3185 2165,3210 2320,3210 ; ST-LINK1.4 2140,4390 2441.73,4088.27 U2.48 2391.29,3564.57 2385.43,3558.71 U2.1 2385.94,3507.76 2424.14,3507.76 2430,3501.9 2430,3363.01 2418.28,3351.3 2385.94,3351.3 U2.9 2330.79,3350.79 2320,3340 2320,3210 ; U2.24 2787.73,3235.43 2797.29,3245 v1(2800,3245) ; v1(2800,3380) 2800,3470 2761.73,3508.27 U2.36 2715,3508.7 2715,3530 2690,3555 2690,3734.14 2695.86,3740 2723,3740 C6.1 2735,3752 C4.2 3018,3752 3055,3715 ; C20.1 2801.34,2947.81 2772.99,2919.46 U8.5 ; R7.2 3015,3435 3055,3475 3055,3715 ; R18.1 2985,2725 2980.86,2729.14 2940.86,2729.14 2875,2795 2790,2795 2772.99,2812.01 U8.5 ; U3.8 3108.86,4398.31 3151.69,4398.31 3170,4380 3170,4039.05 3174.06,4035 3174.06,3695.86 3168.2,3690 3080,3690 3055,3715 ; 2320,3210 2345,3185 2415,3185 2445.27,3154.73 2460.27,3154.73 C1.2 2480,3032 C2.2 2482,2983 2535,2930 2670,2930 2750.66,2849.34 2771.68,2849.34 U8.5
  Bottom Layer w20: v1(1935,3085) 1953.63,3066.37 1953.63,2647.53 1940.39,2634.29 1940.39,2164.61 1953.95,2151.05 2098.95,2151.05 2194.2,2055.8 2194.2,2034.51 2187.2,2027.52 2187.2,2013.94 U4.4 ; ST-LINK1.4 2140,4637.38 2228.67,4726.05 3112.32,4726.05 3125.68,4712.7 3125.68,4670.68 VL1.1 3130.8,4624.2 3130.8,4431.24 3107.17,4407.61 U3.8 ; v1(2800,3245) 2823.63,3268.63 2823.63,3356.37 v1(2800,3380)
+5: C19.1 C22.1 D1.C R16.2 U1.2 U4.16 U8.1 U8.3 | length 3123
  Top Layer w20: R16.2@1980,2463 C19.1 1980,2260 1995,2245 2261.2,2245 2321.2,2185 v1(2415,2185) ; v1@2414.68,2184.68 2882.97,2184.68 2910,2211.72 2910,2520.17 2904.14,2526.02 D1.C@2820,2526.02 ; v1(2730,2755) 2769.96,2755 U8.1 2772.99,2547.32 2794.29,2526.02 D1.C@2820,2526.02 ; U8.3 C22.1 2847.01,2553.03 D1.C@2820,2526.02
  Bottom Layer w10: U4.16 2335,2214.68 2362.08,2187.61 2412.39,2187.61 v1(2415,2185)
  Bottom Layer w20: v1(2730,2755) 2755,2780 2755,3140 3078.07,3463.07 U1.2
Boot0: R2.1 U2.44 | length 142.5
  Top Layer w10: R2.1@2480,3690.26 2489.14,3681.12 2489.14,3645.86 2520.47,3614.53 U2.44
Boot1: R3.2 U2.20 | length 110.6
  Top Layer w10: U2.20 2579.53,3125.47 R3.2@2580,3125
BT1: C13.1 R7.1 SW1.2 U2.25 | length 1536.4
  Top Layer w10: U2.25 2851.73,3291.73 ; C13.1 2895,3523 R7.1 2890,3430 2890,3330 2851.73,3291.73 ; v1(2988.09,3293.09) 2981.02,3293.09 2979.66,3291.73 2851.73,3291.73 ; SW1.2 3120,2550 3175,2605 v1(3175,3090)
  Bottom Layer w10: v1(2988.09,3293.09) 2988.09,3126.91 3025,3090 v1(3175,3090)
CLK: ST-LINK1.2 U2.37 | length 1429.1
  Top Layer w10: U2.37 2658.27,4373.27 v1(2725,4440)
  Bottom Layer w10: ST-LINK1.2 2335,4610 2335,4510 2405,4440 v1(2725,4440)
D+: J1.4 U4.5 | length 215.1
  Top Layer w10: v1(2241.81,1945.66) 2244.07,1943.4 2244.07,1880.9 J1.4@2249.21,1875.76
  Bottom Layer w10: U4.5 2135,1998.15 2170.79,1962.35 2221.43,1962.35 2238.12,1945.66 v1(2241.81,1945.66)
D-: J1.3 U4.6 | length 224
  Top Layer w10: v1(2210,1925) 2210,1923.6 2220.75,1912.85 J1.3
  Bottom Layer w10: U4.6 2085,1998.15 2092.2,1990.94 2093.42,1990.94 2159.36,1925 v1(2210,1925)
DIO: ST-LINK1.3 U2.34 | length 1444.3
  Top Layer w10: v1(2505,3505) 2640,3505 2675.59,3469.41 2714.06,3469.41 U2.34
  Bottom Layer w10: ST-LINK1.3 2248.37,4606.63 2248.37,4336.63 2505,4080 v1(2505,3505)
DRC: L1.2 R13.2 R14.2 R15.2 U7.7 U7.8 | length 934.9
  Top Layer w20: L1.2 2417.37,2792.37 2392.37,2792.37 2365,2765 2365,2500 2330,2465 2242.76,2465 2242.76,2415 2310,2415 2378.31,2346.69 2405.31,2346.69 2420,2332 2515,2332 R14.2@2610,2332
GND: BT1.N C1.1 C2.1 C3.1 C4.1 C5.2 C6.2 C7.2 C8.2 C9.2 C10.2 C11.2 C12.2 C13.2 C15.2 C16.2 C17.2 C18.1 C19.2 C20.2 C21.2 C22.2 J1.5 J1.6 J1.7 J1.8 J1.9 J1.10 J1.11 LED3.2 Q1.2 Q1.3 Q1.6 Q1.7 R2.2 R3.1 R11.1 R12.2 R17.1 S1.1 ST-LINK1.1 SW1.1 U1.1 U2.8 U2.23 U2.35 U2.47 U3.1 U4.1 U5.1 U5.3 U5.9 U6.6 U7.2 U7.4 U8.2 VL1.2 X1.3 Y1.2 Y1.4 | length 1530.3
  Top Layer w10: U5.3 2190,2045 U5.9 ; J1.5 2295.55,1874.33 v2(2312.09,1857.8) 2312.09,1900.21 2305,1907.29 v2(2305,1910) ; v1(2295,3360) 2297.71,3360 2308.18,3370.47 U2.8 ; C11.2 2303,3765 v1(2370,3765) ; R2.2 v1(2400,3760) ; U2.47 2461.42,3437.27 2465,3433.69 v1(2465,3430) ; C15.2 2502.89,1915 v2(2590,1915) ; U2.23 2639.09,3235.94 2639.09,3309.09 v1(2640,3310) ; U2.35 2715.08,3488.07 2751.93,3488.07 2770,3470 v1(2770,3440) ; C6.2 2735,3658 C4.1 2977,3651 C13.2 ; U8.2 2810,2597.71 2820,2587.71 v1(2820,2585) v1@2815,2585 ; v2(2920,1835) 2897.2,1812.2 Q1.2 Q1.3
MCU_RX: R6.2 U2.13 U3.5 | length 2481.9
  Top Layer w10: v1(2525,3175) 2521.86,3175 2512.33,3184.53 2455.47,3184.53 2441.63,3198.37 2441.63,3235.33 2442.24,3235.94 2442.24,3272.24 2624.82,3454.82 2624.82,3474.82 v1(2625,3475)
  Bottom Layer w10: R6.2 2505,2175 2505,2766.06 2525,2786.06 v1(2525,3175) ; v1(2625,3475) 2625,3760 2855,3990 3045,3990 3107.17,4052.17 U3.5
MCU_TX: R5.2 U2.12 U3.4 | length 2982.3
  Top Layer w10: U2.12 2426.73,3291.73 2587.39,3452.39 2587.39,3472.39 v1(2590,3475)
  Bottom Layer w10: R5.2 2525,2764.84 2550,2789.84 2550,3420 2588.54,3458.54 2588.54,3473.54 v1(2590,3475) 2590,4325 2665,4400 U3.4
NetC8_1: C8.1 U4.7 Y1.1 | length 424.2
  Bottom Layer w10: C8.1 1857.86,2070.86 2029.14,2070.86 2035,2065 U4.7 2035,1900.91 2076.34,1859.57 Y1.1
NetC12_1: C12.1 U4.8 Y1.3 | length 231.5
  Bottom Layer w10: C12.1 1853.43,1930.43 Y1.3 1985,1935.16 U4.8
NetC16_1: C16.1 R8.1 U6.5 | length 188.6
  Top Layer w10: R8.1 2600,1805 C16.1 2608.94,1800 2642.93,1833.99 2642.93,1837.93 2650,1845 U6.5
NetC21_1: C21.1 U8.4 | length 171.8
  Top Layer w10: U8.4 2903.03,2848.03 2925.28,2870.28 C21.1 C21.1@2920.46,2942.99
NetLED1_2: LED1.2 R9.2 | length 150.2
  Top Layer w10: R9.2 LED1.2
NetLED2_2: LED2.2 R10.1 | length 154.1
  Top Layer w10: R10.1 2535,2120 LED2.2
NetLED3_1: LED3.1 R18.2 | length 98.1
  Top Layer w10: LED3.1 3072.4,2737.6 R18.2
NetQ1_1: Q1.1 Q1.8 | length 226.8
  Top Layer w10: Q1.1 Q1.8
NetQ1_4: Q1.4 U6.1 | length 325.5
  Top Layer w10: U6.1 2786.54,1807.6 2793.16,1800.98 2793.16,1786.84 2830,1750 2830,1685 2845,1670 2942.53,1670 2948.39,1675.86 Q1.4
NetQ1_5: Q1.5 U6.3 | length 320.1
  Top Layer w10: U6.3 2784.41,1964.41 2835,2015 2942.53,2015 2948.39,2009.14 Q1.5
NetR5_1: R5.1 U4.3 | length 401.9
  Bottom Layer w10: U4.3 2242.2,2004.53 2242.2,1977.8 2265,1955 2520,1955 2525.86,1960.86 2525.86,1987.66 2525,1988.52 R5.1
NetR6_1: R6.1 U4.2 | length 213.5
  Bottom Layer w10: U4.2 2288.38,2015.11 2288.38,2052.52 2300.86,2065 2380,2065 2405.86,2039.14 2430.86,2039.14 R6.1
NetR9_1: R9.1 U5.6 | length 130.8
  Top Layer w10: U5.6 2415,2045 R9.1
NetR10_2: R10.2 U5.7 | length 128.8
  Top Layer w10: U5.7 2420,2095 R10.2
NetR11_2: R11.2 U5.2 | length 141.7
  Top Layer w10: R11.2 1990,2095 U5.2
NetR12_1: R12.1 U6.2 | length 197.5
  Top Layer w10: R12.1 2769.14,1725.86 2740,1725.86 2740,1839.14 2745.86,1845 U6.2
NRST: C5.1 R1.1 S1.2 U2.7 | length 736.7
  Top Layer w10: C5.1 2203,2808.94 2242.8,2848.73 S1.2 2242.8,3059.14 2236.94,3065 2234.69,3065 2220,3079.69 R1.1 2225,3090 v1(2225,3170) ; v1(2225,3235) 2260,3270 2260,3360 2290.16,3390.16 U2.7
  Bottom Layer w10: v1(2225,3170) v1(2225,3235)
OLED_SCL: U1.3 U2.21 | length 937.7
  Top Layer w10: U2.21 2599.21,3180.79 2697.5,3082.5 3092.5,3082.5 3170,3160 3170,3330 3144.45,3355.55 3124.45,3355.55 U1.3@3115,3365
OLED_SDA: U1.4 U2.22 | length 619.9
  Top Layer w10: U2.22 2619.41,3234.92 2619.41,3200.59 2695,3125 2745,3125 2875,3255 3084.46,3255 3085.01,3255.55 3105.55,3255.55 U1.4@3115,3265
OSC32_IN: C10.1 U2.3 X1.2 | length 576.5
  Top Layer w10: C10.1 2090.31,3663 X1.2@2105,3677.69 ; X1.2 X1.2@2105,3677.69 ; v1(2245,3530) 2125,3530 2105,3550 X1.2@2105,3677.69 ; v1(2320,3530) 2320,3485 2336.1,3468.9 U2.3
  Bottom Layer w10: v1(2245,3530) v1(2320,3530)
OSC32_OUT: C11.1 U2.4 X1.1 | length 402.5
  Top Layer w10: X1.1 2205,3682.69 2219.69,3668 C11.1 2295,3663 2295,3470 2315.79,3449.21 U2.4
OSC_IN: C7.1 R4.2 U2.5 XT1.2 | length 597.2
  Top Layer w10: R4.2 1930,3470 1947,3487 C7.1 XT1.2 2194.55,3487 2220.41,3461.15 2220.41,3459.59 2250.47,3429.53 U2.5
OSC_OUT: C9.1 R4.1 U2.6 XT1.1 | length 580.6
  Top Layer w10: R4.1 1935.31,3280 1953.31,3262 C9.1 ; C9.1@2020,3260 2135.47,3260 2144.2,3268.73 2144.2,3273.75 2165.45,3295 XT1.1 2180,3385 2204.84,3409.84 U2.6
SCL: U2.42 VL1.3 | length 1281.1
  Top Layer w10: U2.42 2559.84,4344.84 2760,4545 2850,4545 2905,4600 VL1.3
SDA: U2.43 VL1.4 | length 1195.1
  Top Layer w10: U2.43 2540.16,4385.16 VL1.4
SWC: D1.A L1.1 U7.1 | length 924.8
  Top Layer w20: U7.1@2437.24,2415 2675,2415 ; L1.1 2680,2787.14 2700,2767.14 2700,2440 2675,2415 ; D1.A 2800,2385 2770,2415 2675,2415
TC: C18.2 U7.3 | length 201.3
  Top Layer w20: U7.3@2437.24,2515 2505,2515 2544,2476 C18.2@2622.38,2476
Vcc: BT1.P C15.1 C17.1 R8.2 R13.1 R14.1 R15.1 U5.5 U7.6 | length 5859.3
  Top Layer w20: BT1.P 1650.28,4619.72 1740,4530 1740,2875 ; U5.5 2318.19,1995 2325,1988.19 2325,1945 2355.28,1914.72 ; R15.1@2420,2238 2414.09,2238 2352.78,2299.31 2352.78,2301.02 2293.8,2360 2190,2360 2160,2390 2160,2489.14 2185.86,2515 2242.76,2515 2310,2515 2320,2525 2320,2715 2295,2740 C17.1 2075,2830 2065,2840 1775,2840 1740,2875 ; R15.1 R13.1 R14.1 ; C15.1@2442.81,1914.72 2355.28,1914.72 ; 1740,2875 1740,1860 1910,1690 2423.28,1690 2435,1701.72 2435,1805 2435,1835 2355.28,1914.72
VFB: R16.1 R17.2 U7.5 | length 264.8
  Top Layer w10: R16.1 1985,2565 U7.5@2242.76,2565
Vin: J1.1 LED1.1 LED2.1 U5.4 U5.8 | length 3167.3
  Top Layer w20: v2(2010,1645) 2020,1635 2985,1635 3045,1695 3045,1975 2965,2055 2780,2055 2767.8,2042.8 2765.38,2042.8 2750,2027.42 LED1.1 2749.9,2025.1 2749.9,2119.9 LED2.1 ; v2(2010,1735) 2010,1820 2091.73,1901.73 2091.73,1938.45 ; J1.1 2169.57,1969.96 2144.53,1995 U5.4 2093.54,1995 2091.73,1993.19 2091.73,1938.45 ; U5.8 2310.63,2146.81 2283.66,2146.81 2230.47,2200 1941.72,2200 1930,2188.28 1930,1946.72 1941.72,1935 2088.28,1935 2091.73,1938.45
  Bottom Layer w20: v2(2010,1645) v2(2010,1735)
pads on no net: BT1. J1.2 U1.S1 U1.S2 U1.S3 U1.S4 U2.2 U2.10 U2.11 U2.14 U2.15 U2.16 U2.17 U2.18 U2.19 U2.26 U2.27 U2.28 U2.29 U2.30 U2.31 U2.32 U2.33 U2.38 U2.39 U2.40 U2.41 U2.45 U2.46 U3.2 U3.3 U3.6 U3.7 U4.9 U4.10 U4.11 U4.12 U4.13 U4.14 U4.15 U6.4

## Polygon pours and split planes (outlines as drawn)
GND on Bottom Layer "GND_L02_P001" (solid, pour order 1): 997.5,4747.5 3182.5,4747.5 3185,4745 3185,1615 1005,1615 1000,1620
GND on Top Layer "GND_L01_P000" (solid, remove dead copper, pour order 0): 995,4750 1000,4745 3185,4745 3185,1615 3180,1620 1000,1620

## Keep-outs
Keep-Out Layer:
  the board outline again, w10

## Text inside footprints (layer, text, board x,y; h text height)
BT1: Top Overlay "-" at 1495,1559.68 h70 r90; Top Overlay "+" at 1500,4759.69 h70 r90; Mechanical 13 "-" at 1495,1559.68 h70 r90; Mechanical 13 "+" at 1500,4759.69 h70 r90
C17: Top Overlay "+" at 2192.13,2769.53 h59.06 r180; Bottom Overlay "+" at 2192.13,2769.53 h59.06 r180
C19: Top Overlay "+" at 1847.13,2275.47 h59.06; Bottom Overlay "+" at 1847.13,2275.47 h59.06